# Altium PCB ST7735.PcbDoc
Units mil, origin at the board's own origin, x right, y up, seen from the top; angles counter-clockwise.
Board outline 1770 x 710.66 mil, 2 copper layers (Top Layer, Bottom Layer); 6 components, 12 nets, 24 pads, 8 vias.
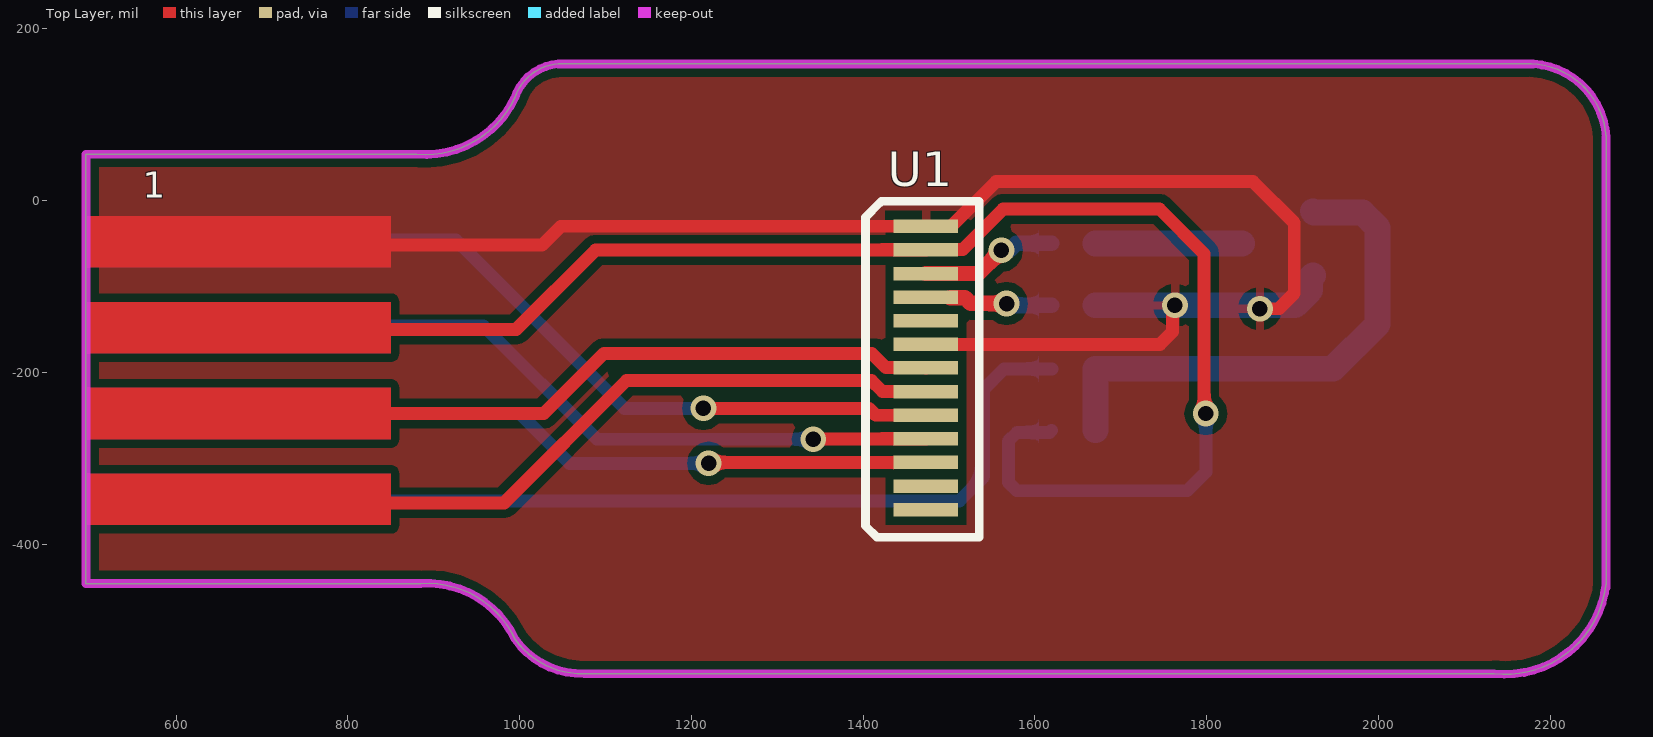
[diagram p0: Top Layer view]
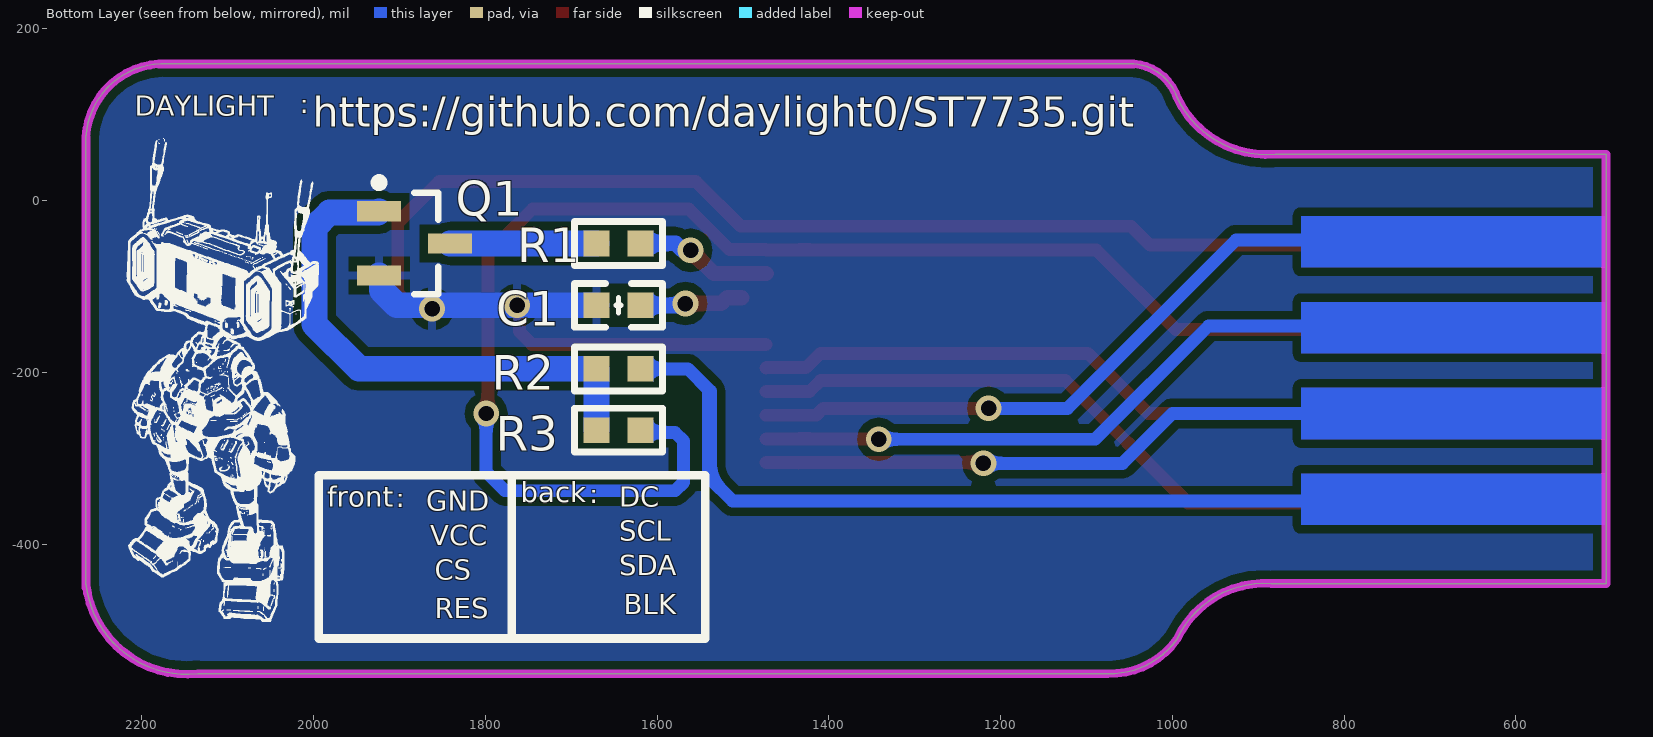
[diagram p1: Bottom Layer view, seen from below]
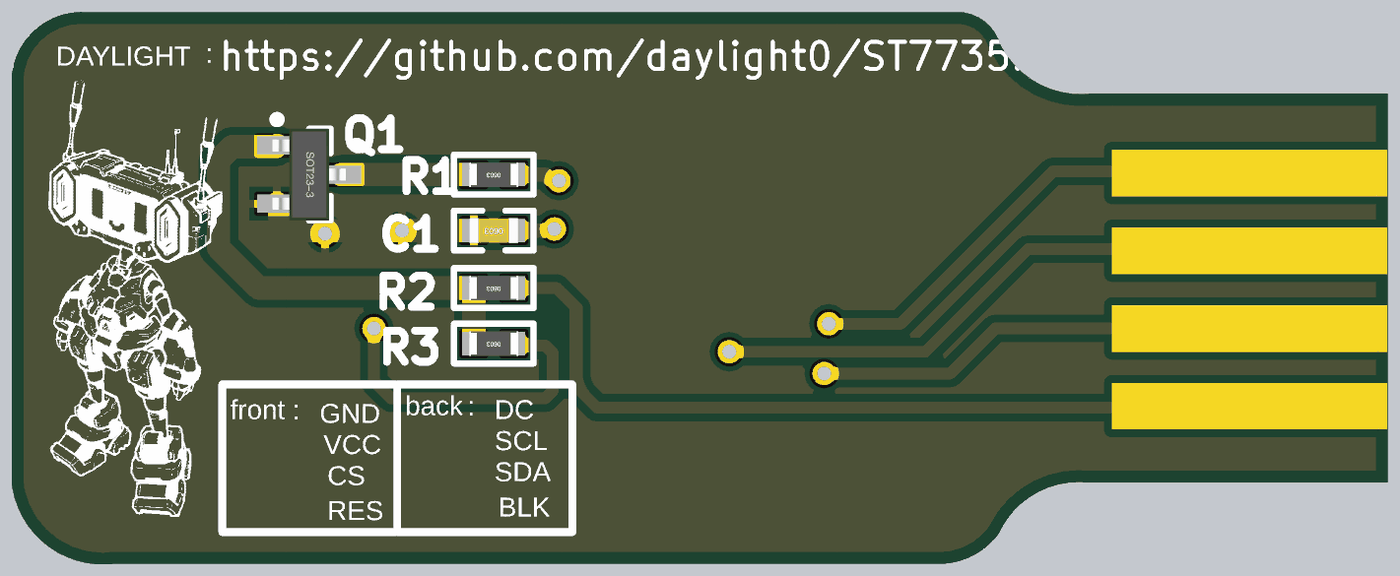
[diagram p2: 3D render of the assembled board from below, using the file's embedded part models]

## Layer stack, top to bottom
Top Solder: solder mask 0.4, Solder Resist, Dk 3.5
Top Layer: signal copper 1.4
Dielectric 1: dielectric 12.6, FR-4, Dk 4.8
Bottom Layer: signal copper 1.4
Bottom Solder: solder mask 0.4, Solder Resist, Dk 3.5

## Board outline
495,-446 495,54 880,54 ccw(c890,169) 994.32,119.58 cw(c1048.77,101.86) 1045,159 2170,159 cw(c2175,69) 2265,74 2265,-446 cw(c2147.5,-433.5) 2135,-551 1075,-551 cw(c1072.71,-455.06) 994.8,-511.09 ccw(c892.5,-558.5) 885,-446

## Design rules (kind name [scope] priority, off if disabled: settings)
Clearance [All] p1: gap=0 ignorepadtopadclearanceinfootprint=TRUE
ComponentClearance [All] p1: gap=0 collisioncheckmode=3 verticalgap=0 showdistances=FALSE
HoleSize [All] p1: absolutevalues=TRUE maxlimit=1000 minlimit=10 maxpercent=80.000 minpercent=20.000
HoleToHoleClearance [All] p1: gap=0 allowstackedmicrovias=TRUE
MinimumSolderMaskSliver [All] p1: minsoldermaskwidth=6
PolygonConnect [All] p1: connectstyle=Relief reliefconductorwidth=10 reliefentries=4 polygonreliefangle="90 Angle" airgapwidth=10
RoutingVias [All] p1: holewidth=24 width=20 viastyle="Through Hole" minholewidth=12 minwidth=30 maxholewidth=1000 maxwidth=1000
SilkToSilkClearance [All] p1: silktosilkclearance=0
SilkToSolderMaskClearance [IsPad] p1: minsilkscreentomaskgap=0 clearancetoexposedcopper=TRUE
SolderMaskExpansion [All] p1: expansion=4 istentingtop=FALSE
Width [All] p1: maxlimit=1000 minlimit=10 preferedwidth=20
24 further rules are at their usual default settings.

## Components (designator, comment, footprint, x,y, rotation, side; value= is the part's Value field where it differs from the comment)
C1 "1uf" CAP 1644.92,-122 r0 bottom
Q1 "" S8050 1896.98,-49.41 r180 bottom
R1 "10" RES 1645,-48.55 r0 bottom
R2 "1k" RES 1645,-194.55 r0 bottom
R3 "10k" RES 1645,-266 r0 bottom
U1 "oled_out" oled_out 1478.6,-196.7 r0 top locked

## Footprints (in the part's own frame and the unit in brackets; to place one, negate y for a bottom-side part, rotate by r counter-clockwise, add the part's x,y. Pads: shape width x height; smd on the part's side, far side on the other; paste and mask are expansions set on the pad)
CAP [mil]
  rect 30x30 smd: 1(-25.59,0) 2(25.59,0)
  silkscreen extent -51,-26 51,26, body extent -31,-16 31,16, height 33
oled_out [mil]
  rect 75x15.7 smd: 1(-5.6,-163.3) 2(-5.6,-135.8) 3(-5.6,-108.3) 4(-5.6,-80.8) 5(-5.6,-53.3) 6(-5.6,-25.8) 7(-5.6,1.7) 8(-5.6,29.2) 9(-5.6,56.7) 10(-5.6,84.2) 11(-5.6,111.7) 12(-5.6,139.2) 13(-5.6,166.7)
  silkscreen extent -76,-196 57,196
RES [mil]
  rect 30x30 smd: 1(-25.67,1.45) 2(25.51,1.45)
  silkscreen extent -51,-24 51,27, body extent -32,-14 31,17, height 16
S8050 [mm]
  rect 1.3x0.6 smd: 1(-0.678,0.935) 2(-0.678,-0.965) 3(1.422,-0.015)
  silkscreen extent -0.8,-1.52 1.07,1.91, body extent -0.83,-1.51 1.57,1.49, height 1.05

## Part data
C1: library part CAP
Q1: library part S8050
R1 R2 R3: library part RES

## Via types
v1: diameter 30, hole 18, Top Layer to Bottom Layer, 8 vias

## Nets (pads, with @x,y where several pads share a name; then routed paths per layer and width w, separated by ;. In a path a pad name is that pad's centre, name@x,y a point inside that pad or via, vN(x,y) a via of type N, cw(c..) or ccw(c..) an arc to the next point about the centre after c; other vN are vias at no path point)
BLK: R2.1 | length 1124.4
  Bottom Layer w15: 728,-344 728,-350 1512,-350 1538,-324 ; 1540,-222 1540,-322 1538,-324 ; R2.1@1620,-196 R2.1 1564,-196 1538,-222 1538,-324
CS: U1.7 | length 717
  Top Layer w15: 792,-248 1028,-248 1098,-178 1410,-178 1426.65,-194.65 1472.65,-194.65 U1.7
DC: U1.5 | length 797.5
  Top Layer w15: v1(1214,-242) 1406.69,-242 1414.69,-250 U1.5
  Bottom Layer w15: 760,-46 926,-46 1122,-242 v1(1214,-242)
GND: C1.2 Q1.2 U1.8 U1.13 | length 1900.7
  Top Layer w15: 788,-38 802,-52 1026,-52 1048,-30 U1.13 1502.65,-30 1554.65,22 1854,22 1902,-26 1902,-108 1884,-126 v1(1862,-126) ; U1.8 1745.5,-167.5 1760.13,-152.87 1760.13,-124.87 v1(1763,-122)
  Bottom Layer w30: C1.2 v1(1763,-122) 1903,-122 1920.57,-104.43 1920.57,-90.51 Q1.2
NetC1_1: C1.1 U1.10 | length 121.5
  Top Layer w18: U1.10@1501.5,-113.15 1518.37,-113.15 1525,-119.78 1566.78,-119.78 v1(1567,-120)
  Bottom Layer w18: v1(1567,-120) 1571,-120 1573,-122 C1.1
NetQ1_1: Q1.1 R2.2 R3.2 | length 617.1
  Bottom Layer w30: R3.2 R2.2 1947,-196 1999,-144 1999,-31.57 1981.43,-14 1925.08,-14 Q1.1
NetQ1_3: Q1.3 R1.2 | length 170.5
  Bottom Layer w30: R1.2 Q1.3
NetR1_1: R1.1 U1.11 | length 160.8
  Top Layer w18: U1.11 1534,-85 v1(1561,-58)
  Bottom Layer w18: v1(1561,-58) 1570.25,-58 1578.25,-50 R1.1
RES: U1.6 | length 773.4
  Top Layer w15: 764,-352 982,-352 1124.5,-209.5 1409.55,-209.5 1422.55,-222.5 U1.6
SCL: U1.4 | length 693.9
  Top Layer w15: v1(1342,-278) 1342.5,-277.5 U1.4
  Bottom Layer w15: 834,-146 958,-146 1090,-278 v1(1342,-278)
SDA: U1.3 | length 733.4
  Top Layer w15: v1(1220,-306) 1221,-305 U1.3
  Bottom Layer w15: 764,-248 1000,-248 1058,-306 v1(1220,-306)
VCC: R3.1 U1.12 | length 1749.3
  Top Layer w15: 718,-150 996,-150 1088.5,-57.5 U1.12 1473.35,-57.15 1515.95,-57.15 1528.5,-44.6 1528.5,-44.54 1563.04,-10 1745,-10 1797,-62 v1@1797,-238
  Bottom Layer w15: R3.1 1616.78,-270 1579,-270 1569,-280 1569,-328 1579,-338 1777,-338 1799,-316 v1(1799,-248)
pads on no net: U1.1 U1.2 U1.9

## Polygon pours and split planes (outlines as drawn)
GND on Bottom Layer "Top Layer-No Net1" (solid, pour order 5): 495,-446 495,54 880,54 ccw(c890,169) 994.32,119.58 cw(c1048.77,101.86) 1045,159 2170,159 cw(c2175,69) 2265,74 2265,-446 cw(c2147.5,-433.5) 2135,-551 1075,-551 cw(c1072.71,-455.06) 994.8,-511.09 ccw(c892.5,-558.5) 885,-446
GND on Top Layer "Top Layer-No Net" (solid, pour order 4): 495,-446 495,54 880,54 ccw(c890,169) 994.32,119.58 cw(c1048.77,101.86) 1045,159 2170,159 cw(c2175,69) 2265,74 2265,-446 cw(c2147.5,-433.5) 2135,-551 1075,-551 cw(c1072.71,-455.06) 994.8,-511.09 ccw(c892.5,-558.5) 885,-446

## Keep-outs
Keep-Out Layer:
  lines w10: 2265,-451 2265,74 ccw(c2175,69) 2170,159 1045,159 ccw(c1048.77,101.86) 994.32,119.58 cw(c890,169) 880,54 495,54 ; 2265,-446 cw(c2147.5,-433.5) 2135,-551 1075,-551 cw(c1072.71,-455.06) 994.8,-511.09 ccw(c892.5,-558.5) 885,-446 495,-446 495,54 ; 495,54 495,54

## Other copper
Top Layer:
  rectangle net GND: 496,-78 850,-18
  rectangle net VCC: 496,-178 850,-118
  rectangle net CS: 496,-278 850,-218
  rectangle net RES: 496,-378 850,-318
Bottom Layer:
  rectangle net BLK: 496,-378 850,-318
  rectangle net SDA: 496,-278 850,-218
  rectangle net SCL: 496,-178 850,-118
  rectangle net DC: 496,-78 850,-18

## Silkscreen, mask and mechanical layers (free items; w line width, h text height)
Top Overlay:
  text "1" at 561,3 h30
Bottom Overlay:
  drawing of 9298 lines, arcs and shapes, not listed
  text ":" at 2016,94 h40
  text "DAYLIGHT" at 2208,90.44 h40
  text "https://github.com/daylight0/ST7735.git" at 2001,85.66 h35
  text ":" at 1679,-360 h40
  text "back" at 1759,-359.59 h40
  text "DC" at 1644,-364.56 h40
  text ":" at 1904,-365 h40
  text "front" at 1984,-364.59 h40
  text "GND" at 1869,-369.56 h40
  text "SCL" at 1644,-404.56 h40
  text "VCC" at 1863.96,-409.56 h40
  text "SDA" at 1644,-444.56 h40
  text "CS" at 1859,-449.56 h40
  text "BLK" at 1639,-490 h40
  text "RES" at 1859,-494.56 h40
Top Solder:
  rectangle: 496,-378 850,-318
  rectangle: 496,-278 850,-218
  rectangle: 496,-178 852,-118
  rectangle: 496,-78 850,-18
Bottom Solder:
  rectangle: 496,-378 850,-318
  rectangle: 496,-278 850,-218
  rectangle: 496,-178 850,-118
  rectangle: 496,-78 850,-18